# EAGLE board crawler_esp12 (EAGLE 8.1.0)
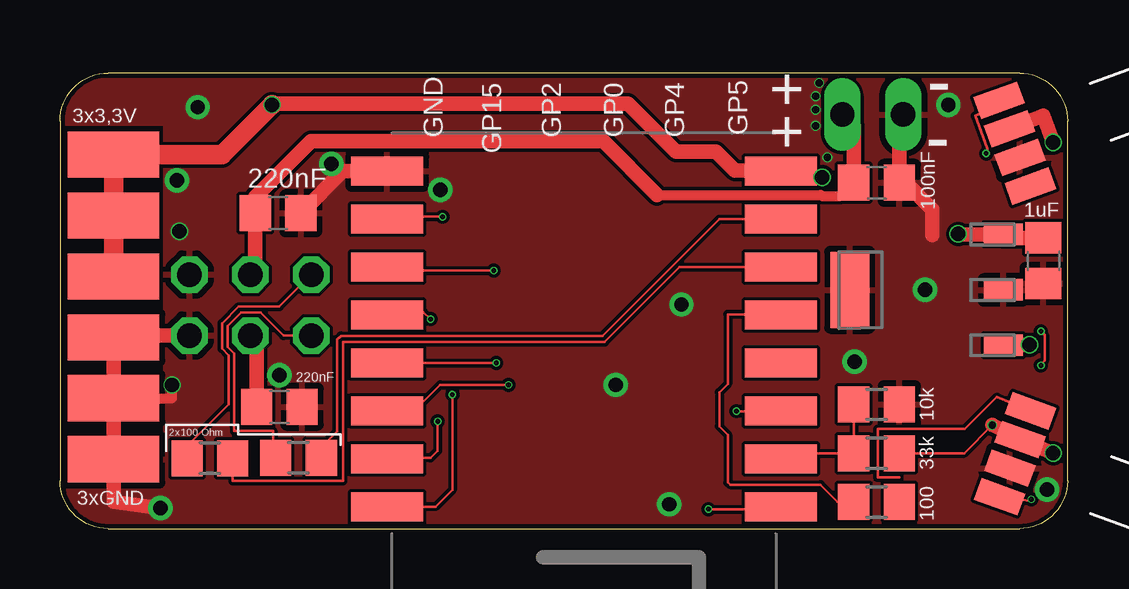
[diagram p0: board, top side]
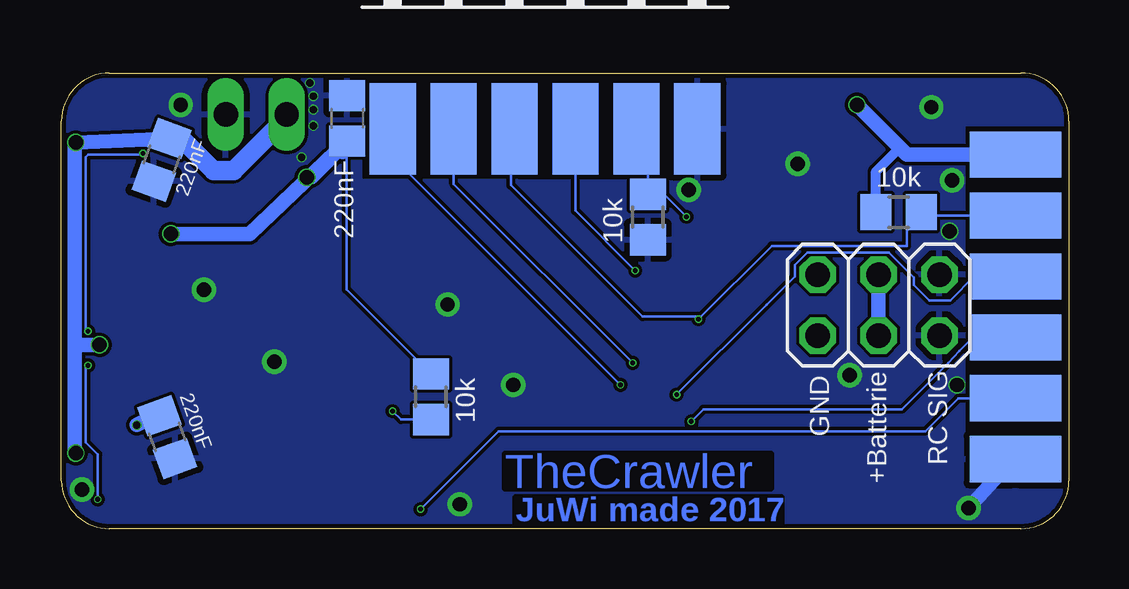
[diagram p1: board, bottom side, seen from below]

Size 42 x 19 mm. Coordinates in mm from the lower left corner, seen from the top.
Outline: 2,0 40,0 arc90 42,2 42,17 arc90 40,19 2,19 arc90 0,17 0,2 arc90 2,0
Copper layers (1*16): Top 0.035mm / dielectric 1.5mm / Bottom 0.035mm
Design rules "aisler_go_2layer": minimum track width 0.1mm, minimum drill 0.2mm, track to track 0.1mm, track to pad 0.1mm, pad to pad 0.1mm, via to via 0.1mm, smd to smd 0mil, copper to edge 0.2mm, drill to drill 0.21mm, minimum pad ring 0.25mm, minimum via ring 0.05mm, stop-mask expansion 0.05mm, vias tented up to drill 0mil, thermal gap 10mil

## Footprints (pad centres in the part's own frame; a part is rotated, then mirrored left to right if it is on the bottom)
C0805 = smd 1.3 x 1.5: 1 -0.95,0; 2 0.95,0
2X03 = drill 1.016 octagon: 1 -2.54,-1.27; 2 -2.54,1.27; 3 0,-1.27; 4 0,1.27; 5 2.54,-1.27; 6 2.54,1.27
1X02 = drill 1.016 long: 1 -1.27,0; 2 1.27,0
1X06/90_SMD = smd 1.93 x 3.81: P$1 -6.35,0; P$2 -3.81,0; P$3 -1.27,0; P$4 1.27,0; P$5 3.81,0; P$6 6.35,0
R0805 = smd 1.3 x 1.5: 1 -0.95,0; 2 0.95,0
ESP12-SMD = smd 3 x 1.2: ADC -8.3,3.8; CH_PD -8.3,1.8; GND 8.1,-8.2; GPIO0 8.1,-2.2; GPIO2 8.1,-4.2; GPIO4 8.1,1.8; GPIO5 8.1,-0.2; GPIO12 -8.3,-4.2; GPIO13 -8.3,-6.2; GPIO14 -8.3,-2.2; GPIO15 8.1,-6.2; GPIO16 -8.3,-0.2; RESET -8.3,5.8; RXD0 8.1,3.8; TXD0 8.1,5.8; VCC -8.3,-8.2
SOT230P700X180-4N = smd 1.626 x 0.889: 1 -3.2,2.311; 2 -3.2,0; 3 -3.2,-2.311 | smd 1.626 x 3.175: 4 3.2,0
EYE_LED_5MM = smd 1.93 x 0.965: 5V 0,0; DIN 0,1.27; DOUT 0,-2.54; GND 0,-1.27

## Placement (x,y rotation side)
C1  220nF  [C0805]  9.09,13.16 0 top
C2  1uF  [C0805]  41,11.18 270 top
C3  220nF  [C0805]  30.09,17.11 90 bottom
C4  220nF  [C0805]  9.14,5.08 0 top
C5  100nF  [C0805]  34.04,14.43 0 top
C6  220nF  [C0805]  37.59,3.82 110 bottom
C7  220nF  [C0805]  37.82,15.38 70 bottom
JP1  [2X03]  7.94,9.32 180 bottom
JP2  [1X02]  33.88,17.27 180 top
JP3  [1X06/90_SMD]  2.24,9.25 90 top
JP4  [1X06/90_SMD]  21.84,16.66 0 bottom
JP5  [1X06/90_SMD]  2.24,9.25 270 bottom
R1  100  [R0805]  9.94,2.96 180 top
R2  100  [R0805]  34.04,1.12 180 top
R3  33k  [R0805]  34.04,3.15 0 top
R4  10k  [R0805]  34.04,5.18 180 top
R5  10k  [R0805]  17.56,12.99 270 bottom
R6  10k  [R0805]  7.1,13.2 0 bottom
R7  10k  [R0805]  26.6,5.5 270 bottom
R8  100  [R0805]  6.25,2.93 180 top
U1  [ESP12-SMD]  21.74,6.71 180 top
U3  MCP1825S-3302E/DB  [SOT230P700X180-4N]  36.12,9.96 180 top
U$1  EYE_LED_5MM  [EYE_LED_5MM]  40.03,3.72 340 top
U$2  EYE_LED_5MM  [EYE_LED_5MM]  39.58,16.67 20 top

## Library data of the parts
C1-C7 R1-R8 = rcl
JP1-JP5 = pinhead
U1 = esp8266modules
U3 = crawler_esp12; MPN: MCP1825S-3302E/DB; OC_FARNELL: 1578404; OC_NEWARK: 26M9961; PACKAGE: SOT-223-3; SUPPLIER: Microchip
U$1 U$2 = crawler_esp12

## Nets
+3V3: C2.1 C3.1 JP3.P$4 JP3.P$5 JP3.P$6 JP5.P$1 R6.1 R7.1 U1.VCC U3.3
+UB: C1.1 C4.1 C5.1 C6.2 C7.2 JP1.3 JP1.4 JP2.2 R3.2 U3.1 U$1.5V U$2.5V
ADC: R3.1 R4.2 U1.ADC
ENABLE: R7.2 U1.CH_PD
GND: C1.2 C2.2 C3.2 C4.2 C5.2 C6.1 C7.1 JP1.1 JP1.2 JP2.1 JP3.P$1 JP3.P$2 JP3.P$3 JP4.P$6 JP5.P$6 R4.1 R5.2 U1.GND U3.2 U3.4 U$1.GND U$2.GND
GPIO0: JP4.P$3 JP5.P$2 R6.2 U1.GPIO0
GPIO2: JP4.P$4 U1.GPIO2
GPIO4: JP4.P$1 U1.GPIO4
GPIO5: JP4.P$2 U1.GPIO5
GPIO12_SERVO0_PIN: JP1.6 R1.2
GPIO13_SERVO1_PIN: JP1.5 R8.2
GPIO14_EYE_LED_PIN: R2.2 U1.GPIO14
GPIO15: JP4.P$5 R5.1 U1.GPIO15
LED_DATA_DAMPENED: R2.1
N$1: U$1.DOUT U$2.DIN
N$2: R1.1 U1.GPIO13
N$3: R8.1 U1.GPIO12
NPDATA: U$1.DIN
RESET: JP5.P$5 U1.RESET
RX: JP5.P$4 U1.RXD0
TX: JP5.P$3 U1.TXD0

## Tracks (layer width: path | path; a pad name or v marks a point on that pad's centre or on a via)
+3V3  (via drill 0.6)
  Top 0.61: v8.84,17.68 8.89,17.73 23.67,17.73 25.67,15.73 27.35,15.73 28.14,14.94 30.01,14.94 U1.VCC 30.23,14.82 30.23,14.67 v31.77,14.66 | C2.1 39.32,12.13 U3.3 37.44,12.27 v37.44,12.29
  Top 0.813: v8.84,17.68 6.76,15.6 JP3.P$6 JP3.P$5 JP3.P$4
  Bottom 0.1: 34.29,12.16 34.15,12.29 | R7.1 30.12,9.97 30.12,16.07
  Bottom 0.406: R6.1 8.05,14.9 7.05,15.89
  Bottom 0.61: JP3.P$6 6.76,15.6 7.05,15.89 v8.84,17.68 | v37.44,12.29 34.15,12.29 C3.1 | C3.1 30.12,16.07 30.28,15.7 | C3.1 31.57,14.67 v31.77,14.66
+UB  (via drill 0.3, 0.6)
  Top 0.1: R3.2 37.69,3.15 v38.86,4.32
  Top 0.406: C5.1 32.54,13.88 31.74,13.88 31.7,13.92 24.89,13.92
  Top 0.61: C5.1 33.09,16.8 JP2.2 | 24.89,13.92 22.66,16.15 10.46,16.15 8.13,13.82 C1.1 8.14,10.79 8.13,10.79 JP1.3 | v41.4,3.15 U$1.5V v38.86,4.32 | U$2.5V 41,17.22 v41.4,16.1 | U3.1 39.34,7.67 v40.41,7.67 | JP1.4 8.19,7.79 C4.1
  Bottom 0.61: 41.45,7.67 41.45,16 v41.4,16.1 C7.2 | 41.45,7.67 41.45,3.3 41.4,3.2 v41.4,3.15 | C6.2 38.35,4.57 v38.86,4.32 | 41.45,7.67 v40.41,7.67 | JP1.3 JP1.4
  Bottom 0.813: C7.2 37,16.27 35.66,14.94 34.82,14.94 32.94,16.82 32.94,16.94 JP2.2
ADC
  Top 0.1: U1.ADC 30.29,3.15 R3.1 R4.2
ENABLE  (via drill 0.2)
  Top 0.1: v28.2,4.9 U1.CH_PD
  Bottom 0.1: R7.2 27.85,4.55 v28.2,4.9
GND  (via drill 0.3, 0.6, 0.6 pad 1.02)
  Top 0.406: JP3.P$2 4.67,5.44 v4.67,5.99
  Top 0.61: 36.37,12.24 36.37,13.31 35.26,14.43 C5.2 34.99,17.1 JP2.1 35.27,17.16 | U1.GND 11.79,14.91 C1.2 10.07,13.16 | C4.2 10.06,5.05 | JP3.P$2 2.23,7.91 | 2.23,7.91 2.23,7.96 2.32,8.05 2.32,8 2.23,7.91 | JP3.P$1 JP3.P$2 | JP3.P$2 JP3.P$3 | JP3.P$1 2.23,1.12 v4.19,0.85 | JP1.2 2.22,8.05 2.22,8.03 2.23,8.03 JP3.P$1
  Bottom 0.61: JP3.P$1 2.29,2.95 v4.19,0.85
  other vias: 33.12,6.96 36.07,9.96 15.85,14.12 31.65,18.59 9.14,6.4 25.4,1.02 23.16,5.99 25.91,9.35 4.98,12.4 5.74,17.58 4.88,14.53 31.5,18.03 31.5,17.48 31.5,16.8 31.99,15.48 41.15,1.63 37.03,17.68 11.32,15.21
  pour Top (isolate 0.14): 0.1,19 41.96,19 41.96,-0.2 0.2,-0.2 -0.06,1.61 4.36,1.61 4.36,16.87 0.1,16.87
  pour Bottom (isolate 0.14): 0.1,19 16.4,18.96 16.4,14.5 29.53,14.54 29.53,18.94 41.86,19 41.86,-0.1 0,-0.1 -0.04,1.61 4.38,1.61 4.38,16.85 0.1,16.85
GPIO0  (via drill 0.2)
  Top 0.1: U1.GPIO0 15,8.91 15.14,9.04 v15.44,8.74
  Bottom 0.1: JP5.P$2 6.01,13.06 R6.2 6.77,12.44 6.77,11.79 12.39,11.79 v15.44,8.74 15.34,8.84 17.78,8.84 23.27,14.33 23.27,16.51 JP4.P$3
GPIO2  (via drill 0.2)
  Top 0.1: U1.GPIO2 13.78,10.77 v18.09,10.77
  Bottom 0.1: v18.09,10.77 20.57,13.26 JP4.P$4
GPIO4  (via drill 0.2)
  Top 0.1: v18.69,5.99 15.85,5.99 14.76,4.91 U1.GPIO4
  Bottom 0.1: v18.69,5.99 28.19,15.49 JP4.P$1
GPIO5  (via drill 0.2)
  Top 0.1: U1.GPIO5 v18.19,6.91
  Bottom 0.1: v18.19,6.91 25.65,14.38 JP4.P$2
GPIO12_SERVO0_PIN
  Top 0.1: JP1.6 9.32,8.05 8.36,9.02 7.56,9.02 6.99,8.45 6.99,7.58 7.26,7.3 7.26,4.08 8.88,4.08 8.88,2.85 8.9,2.85 8.9,2.96 R1.2
GPIO13_SERVO1_PIN
  Top 0.1: R8.2 5.3,3.44 7.04,5.18 7.04,7.23 6.76,7.51 6.76,8.56 7.46,9.26 9.14,9.26 JP1.5
GPIO14_EYE_LED_PIN
  Top 0.1: U1.GPIO14 30.01,8.94 27.84,8.94 27.84,6.04 27.48,5.69 27.48,4.27 27.84,3.91 27.84,1.93 27.94,1.83 31.7,1.83 32.41,1.12 R2.2
GPIO15  (via drill 0.2)
  Top 0.1: U1.GPIO15 13.74,13.01 v15.95,13.01
  Bottom 0.1: JP4.P$5 18.03,15.09 17.56,15.09 R5.1 16.87,13.93 v15.95,13.01
N$1  (via drill 0.2)
  Top 0.1: U$1.DOUT 40.44,1.17 v40.49,1.22 | v38.61,15.65 38.66,15.7 38.66,15.85 38.15,17.22 38.66,17.42 U$2.DIN | v40.89,8.23 41.05,8.08 41.05,7.01 40.89,6.86 v40.89,6.81
  Bottom 0.1: v40.49,1.22 40.49,3.1 41,3.61 41,6.67 v40.89,6.81 | v38.61,15.65 38.56,15.6 40.89,15.6 41,15.49 41,8.35 v40.89,8.23
N$2
  Top 0.1: R1.1 10.89,3.39 11.56,4.05 11.56,7.89 11.71,8.04 22.62,8.04 27.48,12.91 U1.GPIO13
N$3
  Top 0.1: R8.1 7.2,1.99 11.8,1.99 11.8,7.79 22.71,7.79 25.83,10.91 U1.GPIO12
NPDATA
  Top 0.1: 34.99,2.13 34.09,2.13 34.09,4.15 37.72,4.15 39.05,5.49 U$1.DIN
RESET  (via drill 0.2)
  Top 0.1: v27.03,0.81 29.95,0.81 U1.RESET
  Bottom 0.1: JP5.P$5 4.62,5.44 5.99,4.06 23.77,4.06 v27.03,0.81
RX  (via drill 0.2)
  Top 0.1: v15.75,4.47 15.75,3.25 15.44,2.95 13.68,2.95 U1.RXD0
  Bottom 0.1: JP5.P$4 4.01,7.98 4.57,7.42 5.03,6.91 6.96,4.98 15.24,4.98 v15.75,4.47
TX  (via drill 0.2)
  Top 0.1: v16.36,5.59 16.36,1.63 15.65,0.91 U1.TXD0
  Bottom 0.1: JP5.P$3 3.71,10.52 3.81,10.55 | 3.81,10.55 3.86,10.57 | 12.6,9.35 12.62,9.32 | 12.62,9.32 v16.36,5.59 | 12.62,9.32 11.43,10.52 11.43,11 10.91,11.52 7.51,11.52 6.46,10.48 6.46,10.16 5.83,9.53 4.95,9.53 3.93,10.55 3.81,10.55

## Text on the board
Bottom: TheCrawler | JuWi made 2017
tPlace: - | 3x3,3V | + | GND | GP15 | GP2 | GP0 | GP4 | GP5 | + | - | 2x100 Ohm | 3xGND
bPlace: RC SIG | +Batterie | GND